# Altium PCB CSI2-ORIN-NANO_Rev01.PcbDoc
Units mm, origin at the board's own origin, x right, y up, seen from the top; angles counter-clockwise.
Board outline 24 x 36 mm, 4 copper layers (Layer1 Top, Layer2, Layer3, Layer4 Bottom), stack 1.62 mm thick; 39 components, 31 nets, 141 pads, 76 vias.
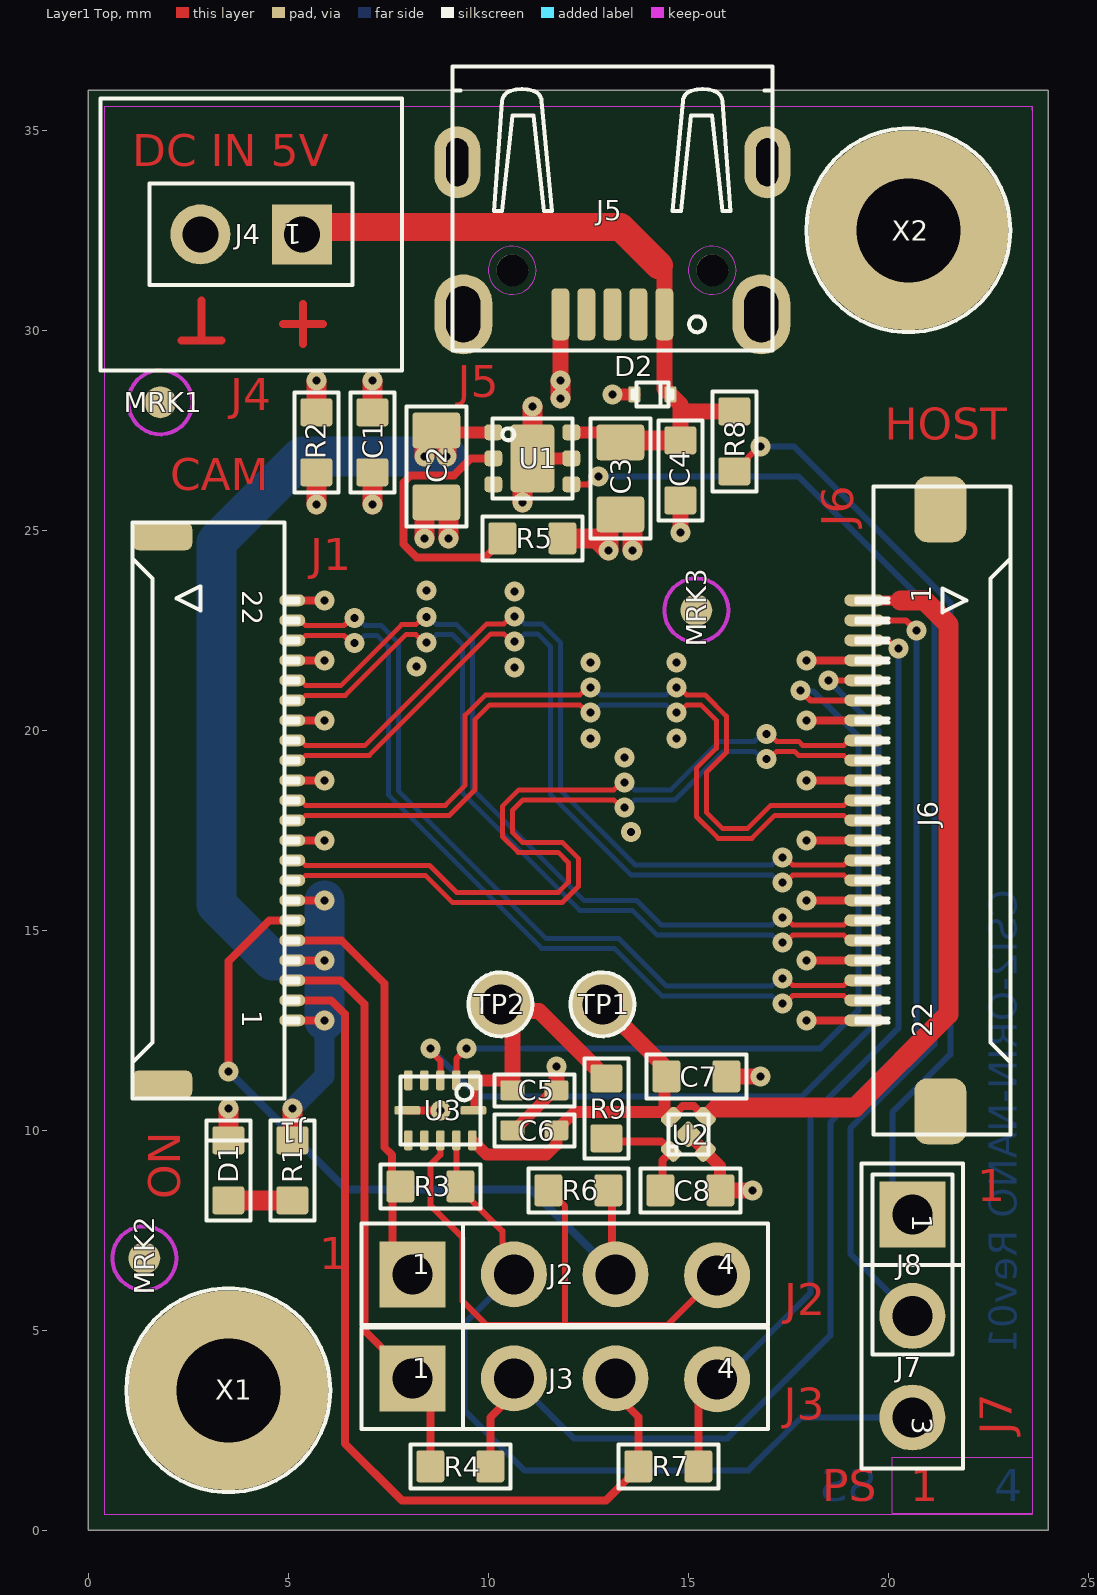
[diagram p0: Layer1 Top view]
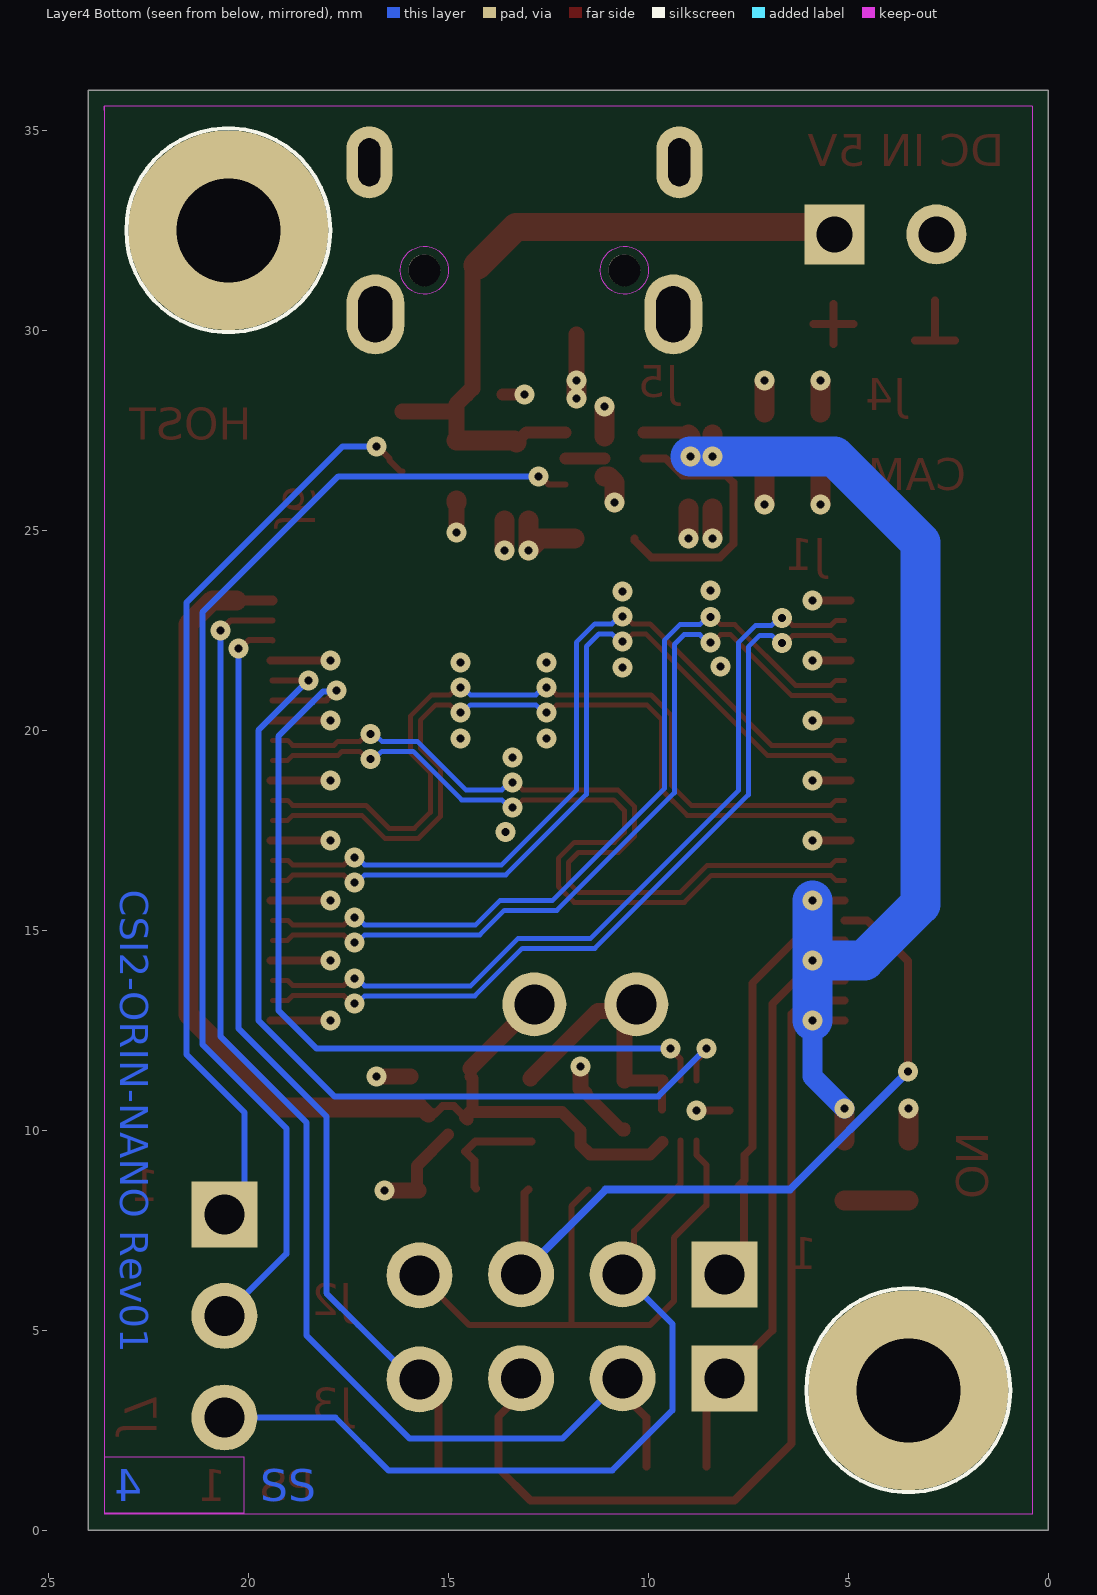
[diagram p1: Layer4 Bottom view, seen from below]
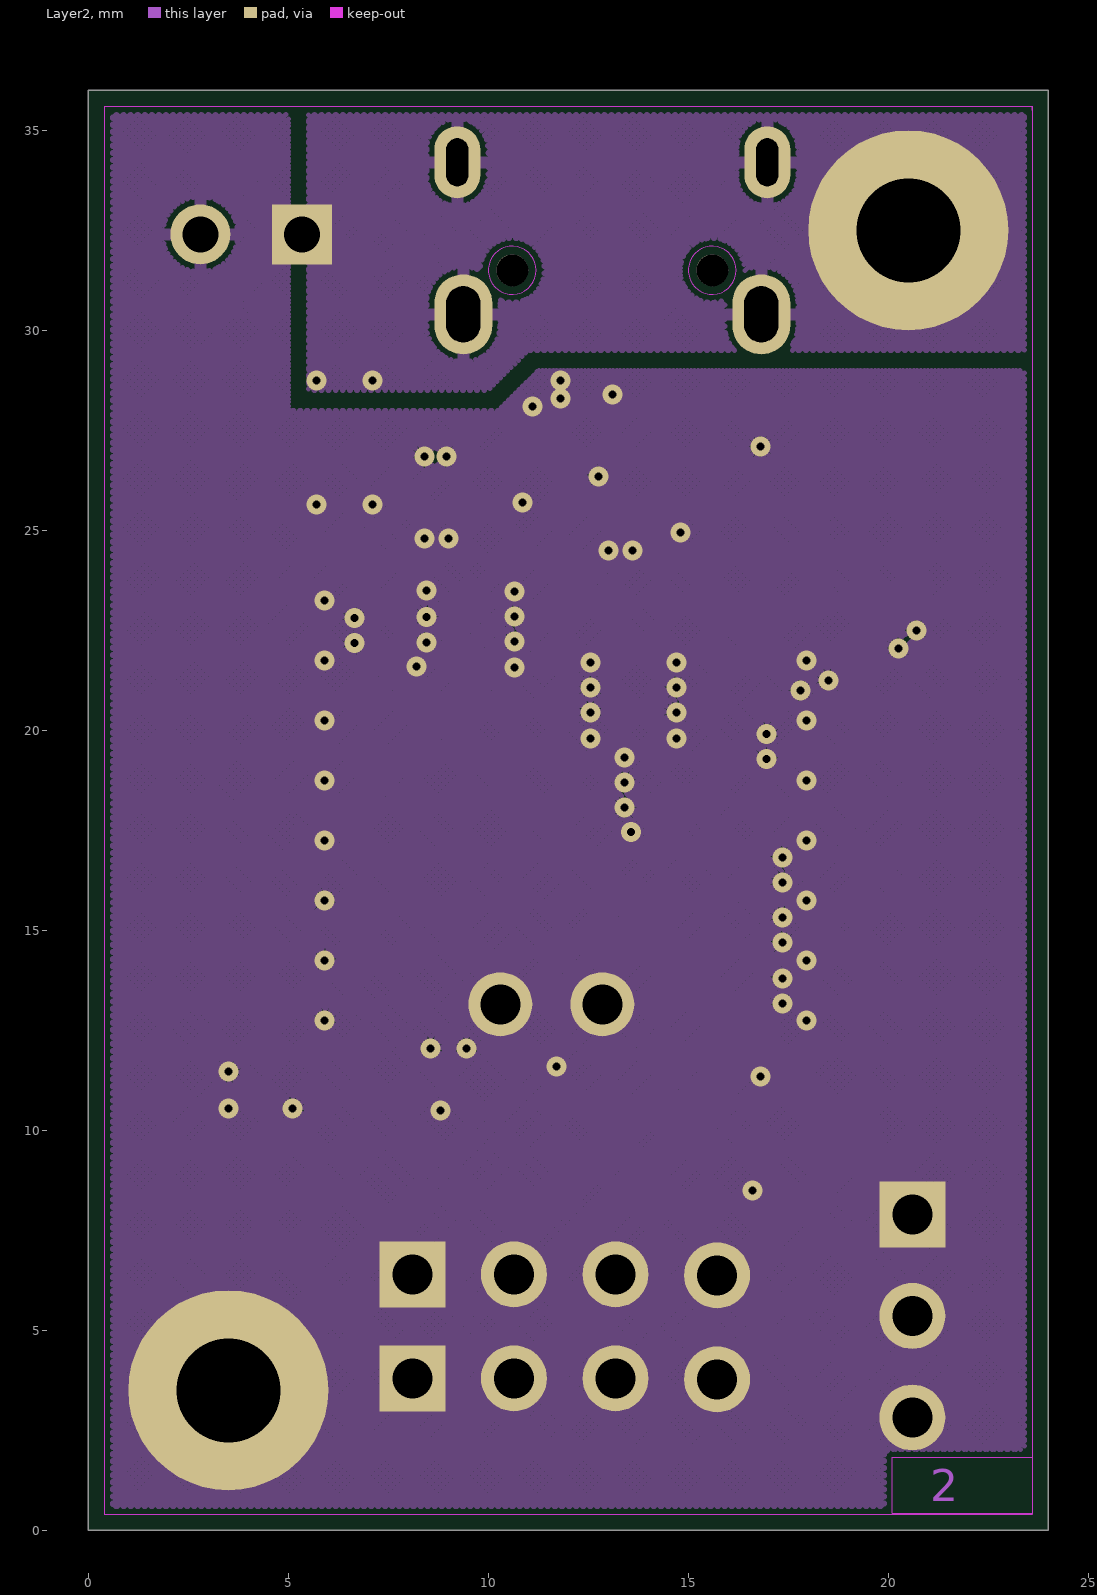
[diagram p2: Layer2]
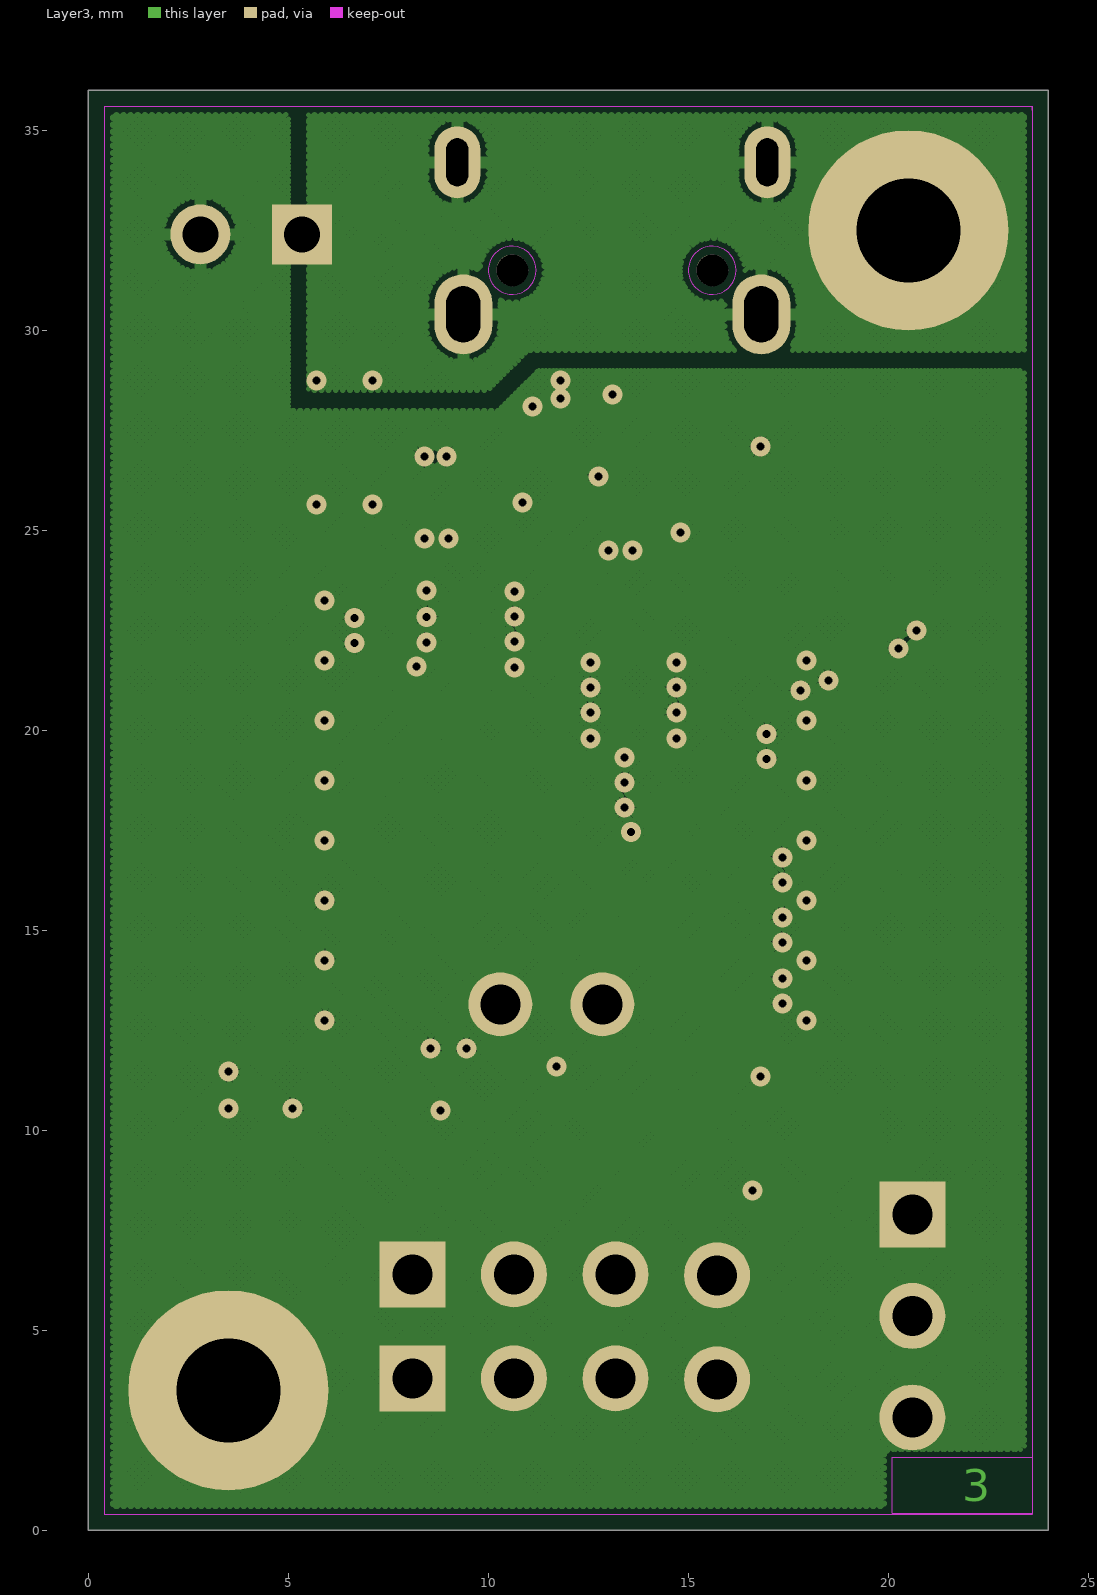
[diagram p3: Layer3]
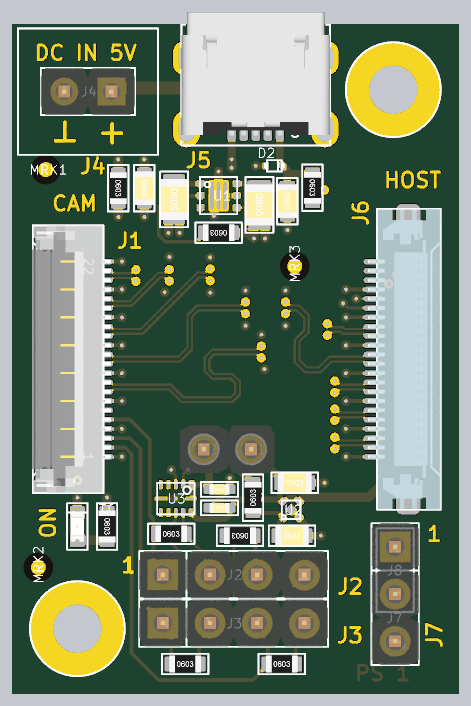
[diagram p4: 3D render of the assembled board from above, using the file's embedded part models]

## Layer stack, top to bottom
Top Solder: solder mask 0.025, Solder Resist, Dk 3.5
Layer1 Top: signal copper 0.035
Dielectric1: prepreg 0.14, PP-006, Dk 4.1
Layer2: signal copper 0.035
Dielectric2: core 1.2, Core-039, Dk 4.8
Layer3: signal copper 0.035
Dielectric3: prepreg 0.14, PP-006, Dk 4.1
Layer4 Bottom: signal copper 0.035
Bottom Solder: solder mask 0.025, Solder Resist, Dk 3.5

## Board outline
0,0 24,0 24,36 0,36

## Design rules (kind name [scope] priority, off if disabled: settings)
Clearance [All] p1: gap=0.125 ignorepadtopadclearanceinfootprint=FALSE except(0: Arc-Hole Track-Hole SMDPad-Hole THPad-Hole Via-Hole Fill-Hole Poly-Hole Region-Hole Text-Hole)
ComponentClearance [All] p1 off: gap=0.254 collisioncheckmode=3 verticalgap=0.254 showdistances=FALSE
DiffPairsRouting [All] p1: maxlimit=1 minlimit=0.125 mostfreqgap=0.125 toplayer_minwidth=0.125 toplayer_maxwidth=0.125 toplayer_prefwidth=0.125 midlayer1_minwidth=0.125 midlayer1_maxwidth=0.125 midlayer1_prefwidth=0.125 midlayer2_minwidth=0.125 midlayer2_maxwidth=0.125 midlayer2_prefwidth=0.125 bottomlayer_minwidth=0.125 bottomlayer_maxwidth=0.125 bottomlayer_prefwidth=0.125 maxuncoupledlength=12.7
FabricationTestPointUsage TestPointUsage [All] p1: valid=0 allowmultiple=FALSE
FabricationTestpoint Testpoint [All] p1: side=3 testpointundercomponent=TRUE minsize=1.016 maxsize=2.54 preferedsize=1.524 minholesize=0 maxholesize=1.016 preferedholesize=0.813 testpointgrid=0.025 allowsidetop=TRUE allowsidebottom=TRUE usegrid=TRUE gridtolerance=0
Height [All] p1 off: minheight=0 maxheight=25.4 prefheight=12.7
HoleSize [All] p1: absolutevalues=TRUE maxlimit=5 minlimit=0.025 maxpercent=80.000 minpercent=20.000
PlaneClearance [All] p1: clearance=0.3
PlaneConnect FreePads [(InPadClass('Free-Pads'))   or (isvia)] p1: planeconnectstyle=Direct reliefexpansion=0.508 reliefentries=4 reliefconductorwidth=0.254 reliefairgap=0.254
PlaneConnect [All] p2: planeconnectstyle=Relief reliefexpansion=0.2 reliefentries=4 reliefconductorwidth=0.2 reliefairgap=0.2
PolygonConnect VIA [isvia or InComponent('X2')] p1: connectstyle=Direct reliefconductorwidth=0.2 reliefentries=4 polygonreliefangle="90 Angle" airgapwidth=0.254
PolygonConnect PolygonConnect_1 [All] p2: connectstyle=Relief reliefconductorwidth=0.3 reliefentries=4 polygonreliefangle="90 Angle" airgapwidth=0.125
RoutingVias [All] p1: holewidth=0.2 width=0.5 viastyle="Through Hole" minholewidth=0.2 minwidth=0.5 maxholewidth=0.2 maxwidth=0.5
SilkToSolderMaskClearance SilkscreenOverComponentPads [IsPad] p1: minsilkscreentomaskgap=0.254 clearancetoexposedcopper=TRUE
SolderMaskExpansion SolderMaskExpansion_VIA [(IsVia)] p1: expansion=-9 istentingtop=FALSE
SolderMaskExpansion [All] p2: expansion=0.05 istentingtop=FALSE
Width [All] p1: maxlimit=2 minlimit=0.1 preferedwidth=0.15
21 further rules are at their usual default settings.

## Classes and differential pairs
net class "100 Ohm": B7-CSI2-TXC_N B7-CSI2-TXC_P B7-CSI2-TXD0_N B7-CSI2-TXD0_P B7-CSI2-TXD1_N B7-CSI2-TXD1_P B7-CSI2-TXD2_N B7-CSI2-TXD2_P B7-CSI2-TXD3_N B7-CSI2-TXD3_P
differential pair B7-CSI2-TXC: +B7-CSI2-TXC_P -B7-CSI2-TXC_N
differential pair B7-CSI2-TXD0: +B7-CSI2-TXD0_P -B7-CSI2-TXD0_N
differential pair B7-CSI2-TXD1: +B7-CSI2-TXD1_P -B7-CSI2-TXD1_N
differential pair B7-CSI2-TXD2: +B7-CSI2-TXD2_P -B7-CSI2-TXD2_N
differential pair B7-CSI2-TXD3: +B7-CSI2-TXD3_P -B7-CSI2-TXD3_N

## Components (designator, comment, footprint, x,y, rotation, side; value= is the part's Value field where it differs from the comment)
C1 "NL" C-0603_1.0 7.1,27.2 r90 top
C2 "10u" C-0805_1.4 8.7,26.6 r270 top
C3 "10u" C-0805_1.4 13.3,26.3 r270 top
C4 "100n" C-0603_1.0 14.8,26.5 r270 top
C5 "100n" C-0402_0.55 11.15,11 r0 top
C6 "100n" C-0402_0.55 11.15,10 r180 top
C7 "4u7" C-0603_1.0 15.2,11.35 r0 top
C8 "4u7" C-0603_1.0 15.05,8.5 r0 top
D1 "GREEN" D-0603-LED 3.5,9 r270 top
D2 "ESD9B5.0ST5G" D-SOD923 14.1,28.4 r0 top
J1 "CON FFC22_Inverted" "J-FH55-22S-0.5SH - Inverted Pins" 5.1,18 r270 top
J2 "CON1x4" "CON 1x4 RM2.54" 8.1,6.4 r0 top
J3 "CON1x4" "CON 1x4 RM2.54" 8.1,3.8 r0 top
J4 "CON1x2" "CON 1x2 RM2.54" 5.34,32.4 r180 top
J5 "USB 2.0 Typ B 90°" J-629105150521 13.1,30.4 r180 top
J6 "54548-2272_Inverted" "J-MOLEX-545482272 - INVERTED PINS" 19.4,18 r90 top
J7 "CON1x3" "CON 1x3 RM2.54" 20.6,7.9 r270 top locked
J8 "Jumper" J-JUMPER-2.54 20.6,6.65 r90 top
MRK1 "Marker Single Layer" PCB_MARKER_PAD_TOP 1.8,28.2 r0 top
MRK2 "Marker Single Layer" PCB_MARKER_PAD_TOP 1.4,6.8 r90 top
MRK3 "Marker Single Layer" PCB_MARKER_PAD_TOP 15.2,23 r0 top
R1 "3k3" R-0603_0.6 5.1,9 r270 top
R2 "0R0" R-0603_0.6 5.7,27.2 r270 top
R3 "NL" R-0603_0.6 8.55,8.6 r0 top
R4 "0R0" R-0603_0.6 9.3,1.6 r0 top
R5 "51k" R-0603_0.6 11.1,24.8 r180 top
R6 "NL" R-0603_0.6 12.25,8.5 r180 top
R7 "0R0" R-0603_0.6 14.5,1.6 r0 top
R8 "270k" R-0603_0.6 16.15,27.225 r270 top
R9 "0R0" R-0603_0.6 12.95,10.55 r90 top
T1 "PCB Text TOP" "PCB TEXTFIELD TOP 2" -50,-30 r0 top locked
T2 "PCB Text BOT" "PCB TEXTFIELD BOT 2" -50,-30 r180 bottom locked
TP1 "TP" TP_16_10 12.85,13.15 r0 top
TP2 "TP" TP_16_10 10.3,13.15 r270 top
U1 "TPS25200DRVT" IC-DFN06_2.0x2.0x0.8 11.1,26.8 r270 top
U2 "NCP103AMX180TCG" IC-XDFN4_1.0x1.0x0.6 15,9.9 r0 top
U3 "NTB0104GU12,115" IC-XQFN12_1.7x2x0.5 8.8,10.5 r270 top
X1 "Hole" HOLE-2.6-5.0-DK 3.5,3.5 r0 top
X2 "Hole" HOLE-2.6-5.0-DK 20.5,32.5 r0 top

## Footprints (in the part's own frame and the unit in brackets; to place one, negate y for a bottom-side part, rotate by r counter-clockwise, add the part's x,y. Pads: shape width x height; smd on the part's side, far side on the other; paste and mask are expansions set on the pad)
C-0402_0.55 [mm]
  rrect20% 0.6x0.5 smd: 1(-0.55,0) 2(0.55,0)
  silkscreen extent -1,-0.4 1,0.4, body extent -0.53,-0.27 0.54,0.28, height 0.55
C-0603_1.0 [mm]
  rrect20% 0.7x0.8 smd: 1(-0.75,0) 2(0.75,0)
  silkscreen extent -1.25,-0.55 1.25,0.55, body extent -0.9,-0.5 0.9,0.5, height 0.99
C-0805_1.4 [mm]
  rrect20% 0.9x1.2 smd: 1(-0.9,0) 2(0.9,0)
  silkscreen extent -1.5,-0.75 1.5,0.75, body extent -1.1,-0.7 1.1,0.7, height 1.4
"CON 1x2 RM2.54" [mm]
  rect 1.5x1.5 hole 0.9: 1(0,0)
  round 1.5 hole 0.9: 2(2.54,0)
  silkscreen extent -1.27,-1.27 3.81,1.27, body extent -1.26,-1.27 3.82,1.27, height 8.57
"CON 1x3 RM2.54" [mm]
  rect 1.65x1.65 hole 1: 1(0,0)
  round 1.65 hole 1: 2(2.54,0) 3(5.08,0)
  silkscreen extent -1.27,-1.27 6.35,1.27, body extent -1.28,-1.27 6.34,1.27, height 8.57
"CON 1x4 RM2.54" [mm] "RM2.54 Connector 1x4"
  rect 1.65x1.65 hole 1: 1(0,0)
  round 1.65 hole 1: 2(2.54,0) 3(5.08,0) 4(7.62,-0.025)
  silkscreen extent -1.27,-1.27 8.89,1.27, body extent -1.28,-1.26 8.88,1.28, height 8.57
D-0603-LED [mm] "Osram Chip LED 0603"
  rrect20% 0.7x0.8 smd: A(0.75,0) K(-0.75,0)
  silkscreen extent -1.25,-0.55 1.25,0.55, body extent -0.82,-0.36 0.83,0.36, height 0.67
D-SOD923 [mm]
  rrect20% 0.3x0.4 smd: A(-0.45,0) K(0.45,0)
  silkscreen extent -0.5,-0.3 0.5,0.3, body extent -0.4,-0.3 0.4,0.3, height 0.4
HOLE-2.6-5.0-DK [mm]
  round 5 hole 2.6: 1(0,0)
  silkscreen extent -2.55,-2.55 2.55,2.55
IC-DFN06_2.0x2.0x0.8 [mm]
  rrect50% 0.4x0.45 smd paste-0.02: 1(-0.65,-0.975) 2(0,-0.975) 3(0.65,-0.975) 4(0.65,0.975) 5(0,0.975) 6(-0.65,0.975)
  rrect20% 1.7x1.1 smd paste-9: 7(0,0)
  silkscreen extent -1,-1 1,1, body extent -1,-1 1,1, height 0.85
IC-XDFN4_1.0x1.0x0.6 [mm]
  rrect50% 0.35x0.5 smd rot 45 paste-0.02 mask+0.05: 1(-0.425,-0.425) 3(0.425,0.425)
  rrect50% 0.35x0.5 smd rot 135 paste-0.02 mask+0.05: 2(0.425,-0.425) 4(-0.425,0.425)
  rrect30% 0.5x0.5 smd rot 45 paste-0.025 mask+0.05: 5(0,0)
  silkscreen extent -0.5,-0.5 0.5,0.5, body extent -0.5,-0.5 0.5,0.5, height 0.6
IC-XQFN12_1.7x2x0.5 [mm]
  rrect50% 0.5x0.32 smd paste-0.025 mask+0.05: 1(-0.75,0.85)
  rrect50% 0.5x0.22 smd paste-0.025 mask+0.05: 2(-0.75,0.4) 3(-0.75,0) 4(-0.75,-0.4) 5(-0.75,-0.8) 7(0.75,-0.8) 8(0.75,-0.4) 9(0.75,0) 10(0.75,0.4) 11(0.75,0.8)
  rrect50% 0.22x0.65 smd paste-0.02 mask+0.05: 6(0,-0.825)
  rrect50% 0.22x0.65 smd paste-0.025 mask+0.05: 12(0,0.825)
  silkscreen extent -0.85,-1 0.85,1, body extent -0.85,-1 0.85,1, height 0.6
J-629105150521 [mm]
  rrect50% 0.45x1.3 smd: 1(-1.3,0) 2(-0.65,0) 3(0,0) 4(0.65,0) 5(1.3,0)
  oval 1.15x1.8 hole 0.55 slot 1.2 at 90 deg: 6(-3.875,-3.8) 9(3.875,-3.8)
  oval 1.45x2 hole 0.85 slot 1.4 at 90 deg: 7(-3.725,0) 8(3.725,0)
  round 0.8 hole 0.8 unplated: ""(-2.5,-1.1) ""(2.5,-1.1)
  Keep-Out Layer circle w0.025: c-2.5,-1.1 r0.6
  Keep-Out Layer circle w0.025: c2.5,-1.1 r0.6
  silkscreen extent -4,-6.2 4,0.9, body extent -4,-6.25 4,0.35, height 2.67
"J-FH55-22S-0.5SH - Inverted Pins" [mm]
  oval 0.3x0.65 smd: 1(5.25,0) 2(4.75,0) 3(4.25,0) 4(3.75,0) 5(3.25,0) 6(2.75,0) 7(2.25,0) 8(1.75,0) 9(1.25,0) 10(0.75,0) 11(0.25,0) 12(-0.25,0) 13(-0.75,0) 14(-1.25,0) 15(-1.75,0) 16(-2.25,0) 17(-2.75,0) 18(-3.25,0) 19(-3.75,0) 20(-4.25,0) 21(-4.75,0) 22(-5.25,0)
  rrect50% 0.7x1.5 smd: 23(-6.85,-3.25) 24(6.85,-3.25)
  silkscreen extent -7.2,-4 7.2,0.15, body extent -7.2,-4.05 7.2,0.2, height 1.46
J-JUMPER-2.54 [mm]
  silkscreen extent -2.25,-1 2.25,1, body extent -2.5,-1.25 2.5,1.25, height 9.5
"J-MOLEX-545482272 - INVERTED PINS" [mm]
  oval 0.3x1 smd: 1(5.25,0) 2(4.75,0) 3(4.25,0) 4(3.75,0) 5(3.25,0) 6(2.75,0) 7(2.25,0) 8(1.75,0) 9(1.25,0) 10(0.75,0) 11(0.25,0) 12(-0.25,0) 13(-0.75,0) 14(-1.25,0) 15(-1.75,0) 16(-2.25,0) 17(-2.75,0) 18(-3.25,0) 19(-3.75,0) 20(-4.25,0) 21(-4.75,0) 22(-5.25,0)
  rrect50% 1.65x1.3 smd: 23(-7.525,-1.9) 24(7.525,-1.9)
  silkscreen extent -8.1,-3.65 8.09,0.2, body extent -8.1,-3.65 8.1,0.2, height 1.18
"PCB TEXTFIELD BOT 2" [mm]
"PCB TEXTFIELD TOP 2" [mm]
PCB_MARKER_PAD_TOP [mm] "PCB Marker with Pad for X-/Y-Coordinates (Single Layer)"
  round 0.8 smd paste-999 mask+0.4: 1(0,0)
  Layer1 Top keep-out circle w0.1: c0,0 r0.8
R-0603_0.6 [mm]
  rrect20% 0.7x0.8 smd: 1(-0.75,0) 2(0.75,0)
  silkscreen extent -1.25,-0.55 1.25,0.55, body extent -0.85,-0.45 0.85,0.45, height 0.59
TP_16_10 [mm] "Testpoint: Pad=1,6mm; Hole=1,0mm"
  round 1.6 hole 1: 1(0,0)
  silkscreen extent -0.8,-0.8 0.8,0.8, body extent -1.27,-1.27 1.27,1.27, height 8.57

## Part data
C1: library part "C X 0603", "Capacitor Ceramic SMD/0603/50V/X7R/10%", Dielectric=X7R, Manufacturer=several, Tolerance=10%, Voltage=50V, Manufacturer Part Number=several
C2 C3: library part "C 10U 16V X5R 0805", "Capacitor Ceramic SMD/0805/16V/X5R/10%", Dielectric=X5R, KHK Part Number=K8340151, Manufacturer=several, Supplier Part Number 1=478-5165-1-ND, Tolerance=10%, Voltage=16V, Manufacturer Part Number=several, Supplier 1=Digi-Key
C4: library part "C 100N 50V X7R 0603", "Capacitor Ceramic SMD/0603/50V/X7R/10%", Dielectric=X7R, KHK Part Number=K8340023, Manufacturer=several, Tolerance=10%, Voltage=50V, Manufacturer Part Number=several
C5 C6: library part "C 100N 10% 16V X7R 402", "Capacitor Ceramic SMD/0402/16V/X7R/10%", Dielectric=X7R, KHK Part Number=K8340114, Manufacturer=several, Tolerance=10%, Voltage=16V, Manufacturer Part Number=several
C7 C8: library part "C 4U7 10V X5R 0603", "Capacitor Ceramic SMD/0603/10V/X5R/10%", Dielectric=X5R, KHK Part Number=1431, Manufacturer=several, Tolerance=10%, Voltage=10V, Manufacturer Part Number=several
D1: library part "D LED 0603 green", "Chip LED green 430mcd", Color=green, Current=20mA, KHK Part Number=8172, Manufacturer=Würth, Manufacturer Part Number=150060GS75000, Supplier Part Number 1=732-4971-1-ND, Supplier 1=Digi-Key
D2: library part "D ESD9B5.0ST5G", "DIODE TVS; 400W; 5.8-7.8V; BIDIRECT", KHK Part Number=7250, Manufacturer="ON Semiconductor", Manufacturer Part Number=ESD9B5.0ST5G
J1: library part "CON FFC22_FH55-22S-0.5SH_Inverted", "FFC Connector 0.5mm shielded", KHK Part Number=10357, Manufacturer=Hirose, Manufacturer Part Number=FH55-22S-0.5SH
J2 J3: library part "CON 1x4 2.54 several", "Header Vertical, 1x4 Pos, Pitch 2.54mm, Contact Length Mating 6.00mm, Contact Length Post 3.00mm, Insulation Height 2.54mm, Gold Plating", KHK Part Number=15343, Manufacturer=several, Supplier Part Number 1=732-5317-ND, Manufacturer Part Number=several, Supplier 1=Digi-Key
J4: library part "CON 1x2 2.54 several", "Header Vertical, 1x2 Pos, Pitch 2.54mm, Contact Length Mating 6.00mm, Contact Length Post 3.00mm, Insulation Height 2.54mm, Gold Plating", KHK Part Number=15337, Manufacturer=several, Supplier Part Number 1=732-5315-ND, Manufacturer Part Number=several, Supplier 1=Digi-Key
J5: library part "CON USB 2.0 Typ B 90°", "Micro USB 2.0 Typ B 90°", KHK Part Number=14360, Manufacturer=WE, Manufacturer Part Number="629 105 150 521"
J6: library part "CON FFC22_54548-2272_Inverted", "CON/W2B/FFC;22-pin;0.5mm;SMT;FEMALE;HORIZONTAL", KHK Part Number=20137, Manufacturer=Molex, Manufacturer Part Number=54548-2272, Supplier Part Number 1=4072781, Supplier 1=Farnell
J7: library part "CON 1x3 2.54 several", "Header Vertical, 1x3 Pos, Pitch 2.54mm, Contact Length Mating 6.00mm, Contact Length Post 3.00mm, Insulation Height 2.54mm, Gold Plating", KHK Part Number=15338, Manufacturer=several, Supplier Part Number 1=WM8073-ND, Manufacturer Part Number=several, Supplier 1=Digi-Key
J8: library part "CON Jumper 2.54mm", "CON/JUMPER/STC02SYAN; 2-pin; 2.54mm; 3A; FEMALE; VERTICAL; BLACK", KHK Part Number=13444, Manufacturer=several, Supplier Part Number 1=S9000-ND, Manufacturer Part Number=several, Supplier 1=Digi-Key
MRK1 MRK2 MRK3: library part "PCB Marker Pad Single Layer", "Position Marker for PCBs"
R1: library part "R 3K3 1% 0603", "Standard Resistor SMD/0603/1%/100mW/TK100", KHK Part Number=K8250070, Manufacturer=several, Supplier Part Number 1=311-3.30KHRCT-ND, Tolerance=1%, Manufacturer Part Number=several, Supplier 1=Digi-Key
R2: library part "R 0R0 1% 0603", "Standard Resistor SMD/0603/1%/100mW/TK200", KHK Part Number=K8250041, Manufacturer=several, Tolerance=1%, Manufacturer Part Number=several
R3 R6: library part "R X 0603", "Standard Resistor SMD/0603/1%/100mW/TK200", Temperature Coefficient=TK100, Tolerance=1%
R4 R7 R9: library part "R 0R0 1% 0603", "Standard Resistor SMD/0603/1%/100mW/TK100", KHK Part Number=K8250041, Manufacturer=several, Tolerance=1%, Manufacturer Part Number=several
R5: library part "R 51K 1% 0603", "Standard Resistor SMD/0603/1%/100mW/TK100", KHK Part Number=K8250156, Manufacturer=several, Tolerance=1%, Manufacturer Part Number=several
R8: library part "R 270K 1% 0603", "Standard Resistor SMD/0603/1%/100mW/TK100", KHK Part Number=K8250170, Manufacturer=several, Temperature Coefficient=na, Tolerance=1%, Manufacturer Part Number=several
T1: library part "PCB TEXT FIELD TOP", "PCB Textfield TOP"
T2: library part "PCB TEXT FIELD BOT", "PCB Textfield BOT"
TP1 TP2: library part TP_16_10, "Testpoint: Pad=1,6mm; Hole=1,0mm"
U1: library part "IC  TPS25200DRVT", "IC/PWR/LOADSW;2V5-6V5;2A5;0R099/6-WDFN/2x2x0.8mm", KHK Part Number=14277, Manufacturer="Texas Instruments", Supplier Part Number 1=296-37760-1-ND, I max=2.5A, Manufacturer Part Number=TPS25200DRVT, Supplier 1=Digi-Key, Vin=2.5V-6.5V
U2: library part "IC NCP103AMX180TCG", "IC/PWR/LDO;2V0-5V5;1V8;0A150/uDFN4/1x1x0.6mm", KHK Part Number=14922, Manufacturer="ON Semi", Iout="Iout : 150mA", Manufacturer Part Number=NCP103AMX180TCG, Vin="Vin : 2.0V-5.5V", Vout=1.8V
U3: library part "IC NTB0104GU12,115", "IC/LOGIC/Levelshifter;Auto-Dir;Bidirectional;Push-Pull;-40-+125°C/", KHK Part Number=14383, Manufacturer=NXP, Manufacturer Part Number=NTB0104GU12,115
X1 X2: library part "PCB HOLE M2.5-5-DK", "HOLE M2.5"

## Via types
v1: diameter 0.5, hole 0.2, Layer1 Top to Layer4 Bottom, 76 vias

## Nets (pads, with @x,y where several pads share a name; then routed paths per layer and width w, separated by ;. In a path a pad name is that pad's centre, name@x,y a point inside that pad or via, vN(x,y) a via of type N, cw(c..) or ccw(c..) an arc to the next point about the centre after c; other vN are vias at no path point)
B7-CSI2-TXC_N: J1.14 J6.15 | length 20.6
  Layer1 Top w0.125: J1.14 5.311,19.25 5.436,19.375 7.025,19.375 10.062,22.412 10.389,22.412 10.577,22.225 v1(10.65,22.225) ; v1(17.35,16.2) 17.431,16.2 17.611,16.38 18.889,16.38 19.019,16.25 J6.15
  Layer4 Bottom w0.125: v1(10.65,22.225) 10.723,22.225 10.911,22.412 11.234,22.412 11.55,22.096 11.55,18.4 13.563,16.387 17.089,16.387 17.277,16.2 v1(17.35,16.2)
B7-CSI2-TXC_P: J1.15 J6.14 | length 20.6
  Layer1 Top w0.125: J1.15 5.311,19.75 5.436,19.625 6.921,19.625 9.959,22.662 10.389,22.662 10.577,22.85 v1(10.65,22.85) ; v1(17.35,16.825) 17.423,16.825 17.423,16.818 17.611,16.63 18.889,16.63 19.009,16.75 J6.14
  Layer4 Bottom w0.125: v1(10.65,22.85) 10.723,22.85 10.911,22.662 11.338,22.662 11.8,22.2 11.8,18.504 13.666,16.638 17.089,16.638 17.277,16.825 v1(17.35,16.825)
B7-CSI2-TXD0_N: J1.20 J6.21 | length 20.6
  Layer1 Top w0.125: J1.20 5.316,22.25 5.436,22.37 6.392,22.37 6.564,22.197 6.564,22.187 v1(6.653,22.187) ; v1(17.35,13.175) 17.451,13.175 17.451,13.211 17.611,13.37 18.889,13.37 19.009,13.25 J6.21
  Layer4 Bottom w0.125: v1(6.653,22.187) 6.726,22.187 6.913,22.375 7.213,22.375 7.5,22.088 7.5,18.386 11.336,14.55 13.15,14.55 14.338,13.362 17.089,13.362 17.277,13.175 v1(17.35,13.175)
B7-CSI2-TXD0_P: J1.21 J6.20 | length 20.6
  Layer1 Top w0.125: J1.21 5.306,22.75 5.436,22.62 6.392,22.62 6.579,22.807 6.579,22.812 v1(6.653,22.812) ; v1(17.35,13.8) 17.436,13.8 17.436,13.795 17.611,13.62 18.889,13.62 19.019,13.75 J6.20
  Layer4 Bottom w0.125: v1(6.653,22.812) 6.726,22.812 6.913,22.625 7.317,22.625 7.75,22.192 7.75,18.49 11.44,14.8 13.254,14.8 14.441,13.613 17.089,13.613 17.277,13.8 v1(17.35,13.8)
B7-CSI2-TXD1_N: J1.17 J6.18 | length 20.6
  Layer1 Top w0.125: J1.17 5.311,20.75 5.436,20.875 6.425,20.875 7.94,22.39 8.189,22.39 8.379,22.2 v1(8.45,22.2) ; v1(17.35,14.7) 17.431,14.7 17.611,14.88 18.889,14.88 19.019,14.75 J6.18
  Layer4 Bottom w0.125: v1(8.45,22.2) 8.521,22.2 8.711,22.39 9.106,22.39 9.35,22.146 9.35,18.436 12.286,15.5 13.6,15.5 14.213,14.887 17.089,14.887 17.277,14.7 v1(17.35,14.7)
B7-CSI2-TXD1_P: J1.18 J6.17 | length 20.6
  Layer1 Top w0.125: J1.18 5.311,21.25 5.436,21.125 6.321,21.125 7.836,22.64 8.189,22.64 8.379,22.83 v1(8.45,22.83) ; v1(17.35,15.325) 17.423,15.325 17.423,15.318 17.611,15.13 18.889,15.13 19.009,15.25 J6.17
  Layer4 Bottom w0.125: v1(8.45,22.83) 8.521,22.83 8.711,22.64 9.21,22.64 9.6,22.25 9.6,18.54 12.39,15.75 13.704,15.75 14.316,15.138 17.089,15.138 17.277,15.325 v1(17.35,15.325)
B7-CSI2-TXD2_N: J1.11 J6.12 | length 20.6
  Layer1 Top w0.125: J1.11 5.311,17.75 5.436,17.875 9.029,17.875 9.673,18.52 9.673,20.273 10.037,20.637 11.838,20.637 12.289,20.637 12.477,20.45 v1(12.55,20.45) ; v1(14.7,20.45) 14.773,20.45 14.961,20.637 15.312,20.637 15.7,20.25 15.7,19.55 15.2,19.05 15.2,17.846 15.746,17.3 16.588,17.3 17.163,17.875 18.889,17.875 19.014,17.75 J6.12
  Layer4 Bottom w0.125: v1(12.55,20.45) 12.623,20.45 12.811,20.637 14.45,20.637 14.637,20.45 v1(14.7,20.45)
B7-CSI2-TXD2_P: J1.12 J6.11 | length 20.6
  Layer1 Top w0.125: J1.12 5.311,18.25 5.436,18.125 8.925,18.125 9.423,18.623 9.423,20.377 9.934,20.887 11.713,20.887 12.289,20.888 12.477,21.075 v1(12.55,21.075) ; v1(14.7,21.075) 14.773,21.075 14.961,20.888 15.416,20.888 15.95,20.354 15.95,19.446 15.45,18.946 15.45,17.95 15.85,17.55 16.484,17.55 17.059,18.125 18.889,18.125 19.014,18.25 J6.11
  Layer4 Bottom w0.125: v1(12.55,21.075) 12.623,21.075 12.811,20.888 14.45,20.888 14.637,21.075 v1(14.7,21.075)
B7-CSI2-TXD3_N: J1.8 J6.9 | length 20.6
  Layer1 Top w0.125: J1.8 5.311,16.25 5.436,16.375 8.425,16.375 9.1,15.7 11.854,15.7 12.25,16.096 12.25,16.8 11.85,17.2 10.85,17.2 10.6,17.45 10.6,17.996 10.866,18.263 13.139,18.263 13.327,18.075 v1(13.4,18.075) ; v1(16.95,19.286) 17.023,19.286 17.211,19.473 17.656,19.473 17.754,19.375 18.889,19.375 19.014,19.25 J6.9
  Layer4 Bottom w0.125: v1(13.4,18.075) 13.473,18.075 13.661,18.262 14.666,18.262 15.877,19.473 16.661,19.473 16.849,19.286 v1(16.95,19.286)
B7-CSI2-TXD3_P: J1.9 J6.8 | length 20.6
  Layer1 Top w0.125: J1.9 5.311,16.75 5.436,16.625 8.529,16.625 9.204,15.95 11.75,15.95 12,16.2 12,16.696 11.746,16.95 10.746,16.95 10.35,17.346 10.35,18.1 10.763,18.513 13.139,18.513 13.327,18.7 v1(13.4,18.7) ; v1(16.95,19.911) 17.023,19.911 17.211,19.723 17.759,19.723 17.858,19.625 18.889,19.625 19.014,19.75 J6.8
  Layer4 Bottom w0.125: v1(13.4,18.7) 13.473,18.7 13.661,18.513 14.563,18.513 15.773,19.723 16.661,19.723 16.849,19.911 v1(16.95,19.911)
C-GND: C1.2 J5.6 J5.7 J5.8 J5.9 R2.1 X2.1 | length 1.6
  Layer1 Top w0.5: R2.1 v1(5.7,28.75) ; C1.2 v1(7.1,28.75)
CAM_I2C_SCL: J3.4 J6.3 R7.2 | length 23.6
  Layer1 Top w0.15: J6.3 19.407,22.257 19.987,22.257 20.194,22.05 v1(20.25,22.05)
  Layer1 Top w0.2: R7.2 15.25,3.305 J3.4
  Layer4 Bottom w0.15: J3.4@15.73,3.785 15.905,3.785 17.256,5.136 18.05,5.93 18.05,10.35 20.25,12.55 v1(20.25,22.05)
  Layer4 Bottom w0.2: J3.4 J3.4@15.73,3.785
CAM_I2C_SDA: J3.2 J6.2 R4.2 | length 32
  Layer1 Top w0.15: J6.2 20.437,22.75 20.687,22.5 v1(20.7,22.5)
  Layer1 Top w0.2: R4.2 10.05,2.818 10.64,3.408 J3.2
  Layer4 Bottom w0.15: J3.2 12.14,2.3 15.975,2.3 18.55,4.875 18.55,10.2 20.7,12.35 v1(20.7,22.5)
CAM_MCLK: J6.5 U3.3 | length 23.3
  Layer1 Top w0.15: v1@8.55,12.063 v1(8.55,12.05) 8.55,11.987 8.8,11.737 U3.3 ; v1(18.5,21.25) J6.5
  Layer4 Bottom w0.15: v1(8.55,12.05) 9.75,10.85 17.85,10.85 19.75,12.75 19.75,20 v1(18.5,21.25)
CAM_MCLK_3V3: J2.4 R6.2 U3.9 | length 15.7
  Layer1 Top w0.15: U3.9 8.8,9.384 8.55,9.133 8.55,8.121 9.361,7.31 9.361,5.728 9.963,5.126 11.898,5.126 11.923,5.126 ; R6.2@11.497,8.525 11.923,8.099 11.923,5.126 ; J2.4@15.363,6.732 J2.4 14.471,5.126 11.923,5.126
CAM_PWDN: J6.6 U3.2 | length 21.6
  Layer1 Top w0.15: U3.2 9.2,11.787 9.45,12.037 v1(9.45,12.05) ; v1(17.8,21) 18.05,20.75 J6.6
  Layer4 Bottom w0.15: v1(9.45,12.05) 18.3,12.05 19.25,13 19.25,19.85 18.4,20.7 18.136,20.964 17.836,20.964 v1(17.8,21)
CAM_PWDN_3V3: J2.2 J7.3 R3.2 U3.10 | length 20.2
  Layer1 Top w0.15: U3.10 9.2,8.65 R3.2@9.316,8.534 ; R3.2@9.327,8.503 10.353,7.477 10.353,6.687 J2.2
  Layer4 Bottom w0.15: J2.2 9.4,5.16 9.4,3 10.9,1.5 16.5,1.5 17.82,2.82 J7.3
EXT-GPIO0-I2C-SCL: J1.2 J3.3 R7.1 | length 22.9
  Layer1 Top w0.2: J1.2 6.072,13.25 6.414,12.908 6.414,2.172 7.842,0.744 12.944,0.744 13.75,1.55 R7.1 13.75,2.838 13.18,3.408 J3.3
EXT-GPIO1-I2C-SDA: J1.3 J3.1 R4.1 | length 14.3
  Layer1 Top w0.2: J1.3 6.309,13.75 6.9,13.159 6.9,5 J3.1 8.55,3.35 R4.1
EXT-GPIO2: J1.5 J2.1 R3.1 | length 10.4
  Layer1 Top w0.2: J1.5 6.325,14.75 7.4,13.675 7.4,9.576 7.589,9.387 7.589,8.761 R3.1@7.75,8.6 ; R3.1@7.602,8.6 7.602,6.898 J2.1
EXT-GPIO3: J1.6 J2.3 R6.1 | length 18.7
  Layer1 Top w0.2: v1(3.51,11.469) 3.51,14.229 4.531,15.25 J1.6 ; R6.1@12.997,8.525 13.089,8.434 13.089,6.491 J2.3
  Layer4 Bottom w0.2: v1(3.51,11.469) 6.463,8.515 11.065,8.515 J2.3
GND: C1.1 C2.2 C3.2 C4.2 C5.2 C6.2 C7.2 C8.2 D1.K D2.A J1.10 J1.13 J1.16 J1.19 J1.22 J4.2 J5.5 J6.4 J6.7 J6.10 J6.13 J6.16 J6.19 J6.22 R2.2 R5.1 U1.5 U1.7 U2.2 U2.5 U3.6 | length 33.6
  Layer1 Top w0.2: J1.10@4.95,17.25 J1.10 v1(5.9,17.25) ; J1.13@4.95,18.75 J1.13 v1(5.9,18.75) ; J1.16@4.95,20.25 J1.16 v1(5.9,20.25) ; J1.19@4.95,21.75 J1.19 v1(5.9,21.75) ; J1.22@4.95,23.25 J1.22 v1(5.9,23.25) ; U3.6 v1(8.8,10.5) ; v1(17.95,12.75) J6.22@19.45,12.75 ; v1(17.95,14.25) J6.19@19.45,14.25 ; v1(17.95,15.75) J6.16@19.45,15.75 ; v1(17.95,17.25) J6.13@19.45,17.25 ; v1(17.95,18.75) J6.10@19.45,18.75 ; v1(17.95,20.25) J6.7@19.45,20.25 ; v1(17.95,21.75) J6.4@19.45,21.75
  Layer1 Top w0.3: C6.2 10.65,10 C5.2@11.55,10.9 ; C6.2@10.6,10.05 C6.2@10.65,10.05 ; U1.7 U1.5 ; C5.2@11.55,10.95 11.65,11.05 11.7,11.05 C5.2 ; v1(13.1,28.4) D2.A ; U2.5@15.002,9.897 U2.2 U2.2@15.423,9.468 ; U2.2@15.477,9.418 15.787,9.108 15.787,8.561 C8.2@15.802,8.547
  Layer1 Top w0.4: C5.2@11.7,11.05 v1(11.7,11.6) ; v1(11.8,28.75) J5.5@11.8,29.9 ; v1@14.8,25 C4.2@14.8,25.7 ; C8.2@15.75,8.5 C8.2 v1(16.6,8.5) ; C7.2 v1(16.8,11.35)
  Layer1 Top w0.5: D1.K v1(3.5,10.55) ; v1(5.7,25.65) R2.2@5.7,26.4 ; v1(7.1,25.65) C1.1@7.1,26.4 ; v1(8.4,24.8) C2.2@8.4,25.55 ; v1(9,24.8) C2.2@9,25.55 ; v1(10.85,25.7) 10.85,26.2 11,26.35 U1.7@11.1,26.35 ; U1.7@11.1,27.35 v1(11.1,28.1) ; v1(11.8,28.3) v1(11.8,28.75) ; R5.1 12.7,24.8 v1(13,24.5) C3.2@13,25.25 ; v1(13.6,24.5) C3.2@13.6,25.25 ; C4.2@14.8,25.7 C4.2
  other v1: 13.57,17.46 13.4,19.325 12.55,19.8 14.7,19.8 10.65,21.575 8.2,21.6 12.55,21.7 14.7,21.7 10.65,23.475 8.45,23.5 14.8,24.95
NetC8_1: C8.1 R9.1 U2.1 | length 2.8
  Layer1 Top w0.2: R9.1@12.925,9.726 14.322,9.726 14.577,9.472 14.578,9.47 14.35,9.242 14.35,8.595 C8.1@14.302,8.547
NetD1_A: D1.A R1.2 | length 1.6
  Layer1 Top w0.5: D1.A R1.2
NetJ7_1: J7.1 R8.2 | length 23.2
  Layer1 Top w0.15: R8.2 16.2,26.475 16.475,26.75 16.475,26.8 16.775,27.1 v1(16.8,27.1)
  Layer4 Bottom w0.15: v1(16.8,27.1) 17.639,27.1 21.55,23.189 21.55,11.9 20.1,10.45 20.1,8.55 J7.1@20.59,8.06
NetJ7_2: J7.2 U1.4 | length 29.8
  Layer1 Top w0.15: U1.4 12.5,26.15 12.7,26.35 v1(12.75,26.35)
  Layer4 Bottom w0.15: v1@12.579,26.35 17.75,26.35 21.15,22.95 21.15,12.15 19.05,10.05 19.05,6.91 J7.2
NetR5_2: R5.2 U1.2 | length 6.9
  Layer1 Top w0.2: U1.2 9.572,26.8 9.147,26.375 8.753,26.375 8.597,26.375 8.203,26.375 8.06,26.375 7.875,26.19 7.875,24.653 8.203,24.325 9.925,24.325 10.35,24.75 R5.2
VCC1V8: C5.1 R9.2 TP2.1 U3.1 U3.12 | length 6.6
  Layer1 Top w0.2: U3.12@9.652,10.516 U3.1@9.652,11.243
  Layer1 Top w0.3: U3.1 C5.1@10.6,11.25
  Layer1 Top w0.4: C5.1@10.6,11.25 TP2.1@10.6,13.025 ; TP2.1@10.6,13.15 TP2.1@10.6,13.025 ; R9.2 11.262,12.988 10.637,12.988 TP2.1@10.6,13.025
VCC3V3: C6.1 C7.1 J6.1 TP1.1 U2.3 U2.4 U3.11 | length 29.2
  Layer1 Top w0.2: U2.4@14.577,10.322 14.857,10.602 15.147,10.602 U2.3@15.355,10.393
  Layer1 Top w0.25: J6.1 20.3,23.25
  Layer1 Top w0.3: U3.11@9.649,9.701 9.954,9.396 11.459,9.396 11.7,9.638 C6.1 12.152,10.452 U2.4@14.474,10.452 ; C7.1 14.4,11.3 14.4,10.526 U2.4@14.474,10.452 ; U2.4@14.577,10.322 14.523,10.269 14.523,10.403 U2.4@14.474,10.452
  Layer1 Top w0.4: TP1.1 C7.1@14.45,11.55 ; U2.3@15.498,10.393 15.724,10.619
  Layer1 Top w0.5: 15.775,10.569 19.169,10.569 21.5,12.9 21.5,22.65 20.9,23.25 20.3,23.25
VCC-CAM: C2.1 J1.1 J1.4 J1.7 R1.1 U1.1 | length 29.9
  Layer1 Top w0.2: J1.1 v1(5.9,12.75) ; J1.4 v1(5.9,14.25) ; J1.7 v1(5.9,15.75)
  Layer1 Top w0.3: C2.1@9,27.45 U1.1
  Layer1 Top w0.5: R1.1 v1(5.1,10.55) ; v1(8.4,26.85) C2.1@8.4,27.4 ; v1(8.95,26.85) 8.95,27.35 C2.1@9,27.4
  Layer4 Bottom w0.5: v1(5.1,10.55) 5.9,11.35 v1(5.9,12.75)
  Layer4 Bottom w1: v1(5.9,12.75) v1(5.9,14.25) ; v1(5.9,15.75) v1(5.9,14.25) ; v1(8.95,26.85) 5.35,26.85 3.2,24.7 3.2,15.65 4.6,14.25 v1(5.9,14.25)
VCC-EXT-IN: C3.1 C4.1 D2.K J4.1 J5.1 R8.1 U1.6 | length 18
  Layer1 Top w0.3: U1.6 13.05,27.45 C3.1
  Layer1 Top w0.4: 14.27,31.62 14.4,31.49 J5.1 14.4,28.55 D2.K 14.8,28.15 14.8,27.975 ; C4.1@14.8,27.28 14.8,27.975 ; R8.1 14.8,27.975
  Layer1 Top w0.5: C3.1 13.35,27.25 C4.1
  Layer1 Top w0.7: J4.1 J4.1@5.528,32.588 ; J4.1@5.678,32.588 13.302,32.588 14.27,31.62
pads on no net: J1.23 J1.24 J5. J5.2 J5.3 J5.4 J6.23 J6.24 MRK1.1 MRK2.1 MRK3.1 U1.3 U3.4 U3.5 U3.7 U3.8 X1.1
copper on no net: | length 4
  Layer1 Top w0.2: 2.33,29.75 3.33,29.75 ; 2.83,29.75 2.83,30.75 ; 4.87,30.156 5.87,30.156 ; 5.37,29.656 5.37,30.656

## Polygon pours and split planes (outlines as drawn)
GND on Layer3 "Layer3-GND" (hatched 45Degree grid 0.125 track 0.125, remove dead copper, pour order 34): 0.5,35.5 5,35.5 5,28 10.25,28 11.25,29 23.5,29 23.5,0.5 0.5,0.5
C-GND on Layer3 "Layer3-C-GND" (hatched 45Degree grid 0.125 track 0.125, remove dead copper, pour order 32): 5.5,28.5 5.5,35.5 23.5,35.5 23.5,29.5 11,29.5 10,28.5
GND on Layer2 "Layer2-GND" (hatched 45Degree grid 0.125 track 0.125, remove dead copper, pour order 38): 0.5,35.5 5,35.5 5,28 10.25,28 11.25,29 23.5,29 23.5,0.5 0.5,0.5
C-GND on Layer2 "Layer2-C-GND" (hatched 45Degree grid 0.125 track 0.125, remove dead copper, pour order 36): 5.5,28.5 5.5,35.5 23.5,35.5 23.5,29.5 11,29.5 10,28.5

## Keep-outs
Keep-Out Layer:
  lines w0.024: 20.1,1.825 20.1,0.425 23.6,0.425
  lines w0.025: 20.1,1.825 23.6,1.825 ; 23.6,35.5 23.6,35.6 ; 23.6,35.5 23.6,35.5 ; 23.6,35.6 0.4,35.6 0.4,0.4 23.6,0.4 23.6,35.6

## Other copper
Layer1 Top:
  text "DC IN 5V" at 1.1,34.1 h0.8
  text "J5" at 9.238,28.325 h0.8
  text "J4" at 3.55,28 h0.8
  text "HOST" at 19.915,27.257 h0.8
  text "CAM" at 2.05,26 h0.8
  text "J6" at 19.124,25.091 h0.8 r90
  text "J1" at 5.55,24 h0.8
  text "ON" at 2.297,8.272 h0.8 r90
  text "1" at 22.222,8.228 h0.8
  text "1" at 5.772,6.528 h0.8
  text "J2" at 17.395,5.382 h0.8
  text "J3" at 17.387,2.759 h0.8
  text "J7" at 23.091,2.387 h0.8 r90
  text "PS" at 18.35,0.725 h0.8
  text "1" at 20.55,0.725 h0.8
Layer2:
  text "2" at 21.05,0.725 h0.8
  text "Layer 2" at -17.25,-38.25 h0.9
Layer3:
  text "3" at 21.85,0.725 h0.8
  text "Layer 3" at -17.25,-38.25 h0.9
Layer4 Bottom:
  text "CSI2-ORIN-NANO Rev01" at 23.207,16.009 h0.7 r90
  text "SS" at 19.7,0.725 h0.8
  text "4" at 22.65,0.725 h0.8

## Silkscreen, mask and mechanical layers (free items; w line width, h text height)
Top Overlay:
  lines w0.1: 0.3,29 0.3,35.8 7.84,35.8 7.84,29 0.3,29
Top Solder:
  lines w0.25: 2.33,29.75 3.33,29.75 ; 2.83,29.75 2.83,30.75 ; 4.87,30.156 5.87,30.156 ; 5.37,29.656 5.37,30.656
  text "DC IN 5V" at 1.1,34.1 h0.8
  text "J5" at 9.238,28.325 h0.8
  text "J4" at 3.55,28 h0.8
  text "HOST" at 19.915,27.257 h0.8
  text "CAM" at 2.05,26 h0.8
  text "J6" at 19.124,25.091 h0.8 r90
  text "J1" at 5.55,24 h0.8
  text "ON" at 2.297,8.272 h0.8 r90
  text "1" at 22.222,8.228 h0.8
  text "1" at 5.772,6.528 h0.8
  text "J2" at 17.395,5.382 h0.8
  text "J3" at 17.387,2.759 h0.8
  text "J7" at 23.091,2.387 h0.8 r90
Bottom Solder:
  text "CSI2-ORIN-NANO Rev01" at 23.207,16.009 h0.7 r90
Mechanical 1:
  the board outline again, w0.025
Drill Drawing:
  circle w0.1: c-98.044,-19.232 r0.417
  lines w0.1: -99.2,-22.086 -30.919,-22.086 ; -99.2,-8.961 -30.919,-8.961 ; -97.5,36 -59.75,36 ; -97.5,37.5 -59.75,37.5 ; -97.5,39 -59.75,39 ; -97.5,40.5 -59.75,40.5 ; -97.5,42 -59.75,42 ; -97.5,43.5 -59.75,43.5 ; -97.5,45 -59.75,45 ; -97.5,46.5 -59.75,46.5 ; -92.394,-23.961 -92.394,-7.086 ; -83.751,-23.961 -83.751,-7.086 ; -82.5,32.5 -82.5,34 ; -82.5,34.5 -82.5,48 ; -75.5,32.5 -75.5,34 ; -75.5,34.5 -75.5,48 ; -67.011,-23.961 -67.011,-7.086 ; -60.768,-23.961 -60.768,-7.086 ; -51.675,-23.961 -51.675,-7.086 ; -99.2,-23.961 -30.919,-23.961 -30.919,-7.086 -99.2,-7.086 -99.2,-23.961 ; -98.46,-21.523 -97.627,-21.523 -97.627,-20.69 -98.46,-20.69 -98.46,-21.523 ; -98.46,-16.94 -97.627,-16.94 -98.044,-17.773 -98.46,-16.94 ; -98.46,-15.69 -98.252,-15.69 -98.044,-15.898 -97.835,-15.69 -97.627,-15.69 -97.835,-15.482 -97.627,-15.273 -97.835,-15.273 -98.044,-15.065 -98.252,-15.273 -98.46,-15.273 -98.252,-15.482 -98.46,-15.69 ; -98.46,-14.023 -98.044,-13.815 -97.627,-14.023 -97.835,-13.607 -97.627,-13.19 -98.044,-13.398 -98.46,-13.19 -98.252,-13.607 -98.46,-14.023 ; -98.46,-11.94 -98.252,-11.94 -98.252,-12.148 -97.835,-12.148 -97.835,-11.94 -97.627,-11.94 -97.627,-11.523 -97.835,-11.523 -97.835,-11.315 -98.252,-11.315 -98.252,-11.523 -98.46,-11.523 -98.46,-11.94 ; -98.46,-10.273 -98.46,-10.065 -98.252,-9.857 -98.46,-9.648 -98.46,-9.44 -98.252,-9.44 -98.044,-9.648 -97.835,-9.44 -97.627,-9.44 -97.627,-9.648 -97.835,-9.857 -97.627,-10.065 -97.627,-10.273 -97.835,-10.273 -98.044,-10.065 -98.252,-10.273 -98.46,-10.273 ; -97.5,32.5 -59.75,32.5 -59.75,34 -97.5,34 -97.5,32.5 ; -97.5,34.5 -97.5,48 -59.75,48 -59.75,34.5 -97.5,34.5 ; -97.5,48.5 -97.5,50 -59.75,50 -59.75,48.5 -97.5,48.5
  text "Layer Stackup 4  FR4 TG150" at -96.5,49 h0.8
  text "Top Soldermask" at -96.5,47 h0.8
  text "25 um" at -80,47 h0.8
  text "standard" at -74.5,47 h0.8
  text "Layer1 Top" at -96.25,45.5 h0.8
  text "35 um" at -80,45.5 h0.8
  text "Signal / Zdiff 100R" at -74.5,45.5 h0.8
  text "L 125um / S 125um / L 125um" at -58.25,45.5 h0.8
  text "Prepreg 2x1080" at -96.25,44 h0.8
  text "140 um" at -80.75,44 h0.8
  text "Layer2" at -96.25,42.5 h0.8
  text "35 um" at -80,42.5 h0.8
  text "Plane / Ref." at -74.5,42.5 h0.8
  text "Core / Prepreg" at -96.25,41 h0.8
  text "1200 um" at -81.5,41 h0.8
  text "Layer3" at -96.25,39.5 h0.8
  text "35 um" at -80,39.5 h0.8
  text "Plane / Ref." at -74.5,39.5 h0.8
  text "Prepreg 2x1080" at -96.25,38 h0.8
  text "140 um" at -80.75,38 h0.8
  text "Layer4 Bottom" at -96.25,36.5 h0.8
  text "35 um" at -80,36.5 h0.8
  text "Signal / Zdiff 100R" at -74.5,36.5 h0.8
  text "L 125um / S 125um / L 125um" at -58.25,36.5 h0.8
  text "Bottom Soldermask" at -96.25,35 h0.8
  text "25 um" at -80,35 h0.8
  text "standard" at -74.5,35 h0.8
  text "Thickness approx." at -96.5,33 h0.8
  text "1600 um" at -81.5,33 h0.8
  text "Symbol" at -98.075,-8.398 h0.9
  text "Hit Count" at -91.832,-8.398 h0.9
  text "Finished Hole Size" at -83.189,-8.398 h0.9
  text "Plated" at -66.449,-8.398 h0.9
  text "Hole Type" at -60.205,-8.398 h0.9
  text "Drill Layer Pair" at -51.113,-8.398 h0.9
  text "76" at -91.832,-10.273 h0.75
  text "0.200mm (7.87mil)" at -83.189,-10.273 h0.75
  text "PTH" at -66.449,-10.273 h0.75
  text "Round" at -60.205,-10.273 h0.75
  text "Layer1 Top - Layer4 Bottom" at -51.113,-10.273 h0.75
  text "2" at -91.832,-12.148 h0.75
  text "0.550mm (21.65mil)" at -83.189,-12.148 h0.75
  text "PTH" at -66.449,-12.148 h0.75
  text "Slot" at -60.205,-12.148 h0.75
  text "Layer1 Top - Layer4 Bottom" at -51.113,-12.148 h0.75
  text "2" at -91.832,-14.023 h0.75
  text "0.800mm (31.50mil)" at -83.189,-14.023 h0.75
  text "NPTH" at -66.449,-14.023 h0.75
  text "Round" at -60.205,-14.023 h0.75
  text "Layer1 Top - Layer4 Bottom" at -51.113,-14.023 h0.75
  text "2" at -91.832,-15.898 h0.75
  text "0.850mm (33.47mil)" at -83.189,-15.898 h0.75
  text "PTH" at -66.449,-15.898 h0.75
  text "Slot" at -60.205,-15.898 h0.75
  text "Layer1 Top - Layer4 Bottom" at -51.113,-15.898 h0.75
  text "2" at -91.832,-17.773 h0.75
  text "0.900mm (35.43mil)" at -83.189,-17.773 h0.75
  text "PTH" at -66.449,-17.773 h0.75
  text "Round" at -60.205,-17.773 h0.75
  text "Layer1 Top - Layer4 Bottom" at -51.113,-17.773 h0.75
  text "13" at -91.832,-19.648 h0.75
  text "1.000mm (39.37mil)" at -83.189,-19.648 h0.75
  text "PTH" at -66.449,-19.648 h0.75
  text "Round" at -60.205,-19.648 h0.75
  text "Layer1 Top - Layer4 Bottom" at -51.113,-19.648 h0.75
  text "2" at -91.832,-21.523 h0.75
  text "2.600mm (102.36mil)" at -83.189,-21.523 h0.75
  text "PTH" at -66.449,-21.523 h0.75
  text "Round" at -60.205,-21.523 h0.75
  text "Layer1 Top - Layer4 Bottom" at -51.113,-21.523 h0.75
  text "99 Total" at -91.832,-23.398 h0.75
  text "Slot definitions :" at -98.075,-25.16 h0.75
  text "Routed Path Length" at -85.236,-25.16 h0.75
  text "= Calculated from tool start centre position to tool end centre position." at -71.523,-25.16 h0.75
  text "Hole Length" at -85.236,-26.36 h0.75
  text "= Routed Path Length + Tool Size = Slot length as defined in the PCB layout" at -76.646,-26.36 h0.75

## Dimensions
24,36 to 0,36 on Drill Drawing
0,36 to 0,0 on Drill Drawing

## Text inside footprints (layer, text, board x,y; h text height)
J1: Top Overlay "1" at 3.85,13 h0.5 r270; Top Overlay "22" at 3.85,23.5 h0.5 r270
J2: Top Overlay "4" at 15.72,6.4 h0.5; Top Overlay "1" at 8.1,6.4 h0.5
J3: Top Overlay "4" at 15.72,3.8 h0.5; Top Overlay "1" at 8.1,3.8 h0.5
J4: Top Overlay "1" at 5.34,32.65 h0.5 r180
J6: Top Overlay "1" at 21.08,23.19 h0.5 r90; Top Overlay "22" at 21.1,12.32 h0.5 r90
J7: Top Overlay "3" at 20.6,2.82 h0.5 r270; Top Overlay "1" at 20.6,7.9 h0.5 r270
T1: Drill Drawing "All drills (PTH and NPTH) should run in one work process" at -101,-43 h0.8; Mechanical 16 "Project:" at -49,-36 h0.89; Mechanical 16 "Layer Name:" at -17,-36 h0.89; Mechanical 16 "Germany" at -1.75,-31.75 h0.89; Mechanical 16 "Stadtroda" at -14.25,-33.5 h0.89; Mechanical 16 "Taschenweg 2a" at -14.5,-31.75 h0.89; Mechanical 16 "Allied Vision" at -23.75,-31.75 h0.89; Mechanical 16 "Date:" at -49,-40.5 h0.89; Mechanical 16 "Title:" at -49,-31.5 h0.89; Mechanical 16 "PCB Designer:" at -33,-36 h0.89; Mechanical 16 "File Name:" at -33,-40.5 h0.89; Mechanical 16 "Technologies" at -23.75,-33.25 h0.89; Mechanical 16 "Bare Board Number:" at 6,-36 h0.89; Mechanical 16 "Bare Board Revision:" at 6,-31.5 h0.89; Mechanical 16 "2" at -74.75,-44.5 h0.5; Mechanical 16 "3" at -54.75,-44.5 h0.5; Mechanical 16 "4" at -34.75,-44.5 h0.5; Mechanical 16 "5" at -14.75,-44.5 h0.5; Mechanical 16 "6" at 5.25,-44.5 h0.5; Mechanical 16 "7" at 25.25,-44.5 h0.5; Mechanical 16 "1" at -94.75,-44.5 h0.5; Mechanical 16 "1" at -94.75,54.5 h0.5; Mechanical 16 "7" at 25.25,54.5 h0.5; Mechanical 16 "6" at 5.25,54.5 h0.5; Mechanical 16 "5" at -14.75,54.5 h0.5; Mechanical 16 "4" at -34.75,54.5 h0.5; Mechanical 16 "3" at -54.75,54.5 h0.5; Mechanical 16 "2" at -74.75,54.5 h0.5; Mechanical 16 "A" at -104.117,44.95 h0.5; Mechanical 16 "B" at -104.117,24.95 h0.5; Mechanical 16 "C" at -104.117,4.95 h0.5; Mechanical 16 "D" at -104.117,-15.05 h0.5; Mechanical 16 "E" at -104.117,-35.05 h0.5; Mechanical 16 "E" at 34.883,-35.05 h0.5; Mechanical 16 "D" at 34.883,-15.05 h0.5; Mechanical 16 "C" at 34.883,4.95 h0.5; Mechanical 16 "B" at 34.883,24.95 h0.5; Mechanical 16 "A" at 34.883,44.95 h0.5
T2: Mechanical 15 "Bare Board Revision:" at -21.5,-31.5 h0.89; Mechanical 15 "Bare Board Number:" at -21.5,-36 h0.89; Mechanical 15 "Technologies" at 8.25,-33.25 h0.89; Mechanical 15 "File Name:" at 17.5,-40.5 h0.89; Mechanical 15 "PCB Designer:" at 17.5,-36 h0.89; Mechanical 15 "Title:" at 33.5,-31.5 h0.89; Mechanical 15 "Date:" at 33.5,-40.5 h0.89; Mechanical 15 "Allied Vision" at 8.25,-31.75 h0.89; Mechanical 15 "Taschenweg 2a" at -1,-31.75 h0.89; Mechanical 15 "Stadtroda" at -1.25,-33.5 h0.89; Mechanical 15 "Germany" at -13.75,-31.75 h0.89; Mechanical 15 "Layer Name:" at 1.5,-36 h0.89; Mechanical 15 "A" at -103.883,44.95 h0.5; Mechanical 15 "B" at -103.883,24.95 h0.5; Mechanical 15 "C" at -103.883,4.95 h0.5; Mechanical 15 "D" at -103.883,-15.05 h0.5; Mechanical 15 "E" at -103.883,-35.05 h0.5; Mechanical 15 "E" at 35.117,-35.05 h0.5; Mechanical 15 "D" at 35.117,-15.05 h0.5; Mechanical 15 "C" at 35.117,4.95 h0.5; Mechanical 15 "B" at 35.117,24.95 h0.5; Mechanical 15 "A" at 35.117,44.95 h0.5; Mechanical 15 "2" at 5.75,54.5 h0.5; Mechanical 15 "3" at -14.25,54.5 h0.5; Mechanical 15 "4" at -34.25,54.5 h0.5; Mechanical 15 "5" at -54.25,54.5 h0.5; Mechanical 15 "6" at -74.25,54.5 h0.5; Mechanical 15 "7" at -94.25,54.5 h0.5; Mechanical 15 "1" at 25.75,54.5 h0.5; Mechanical 15 "1" at 25.75,-44.5 h0.5; Mechanical 15 "7" at -94.25,-44.5 h0.5; Mechanical 15 "6" at -74.25,-44.5 h0.5; Mechanical 15 "5" at -54.25,-44.5 h0.5; Mechanical 15 "4" at -34.25,-44.5 h0.5; Mechanical 15 "3" at -14.25,-44.5 h0.5; Mechanical 15 "2" at 5.75,-44.5 h0.5; Mechanical 15 "Project:" at 33.5,-36 h0.89